# Altium PCB PCB2.PcbDoc
Units mil, origin at the board's own origin, x right, y up, seen from the top; angles counter-clockwise.
Board outline 3500 x 2000 mil, 2 copper layers (Top Layer, Bottom Layer), stack 61.756 mil thick; 25 components, 12 nets, 69 pads, 9 vias.
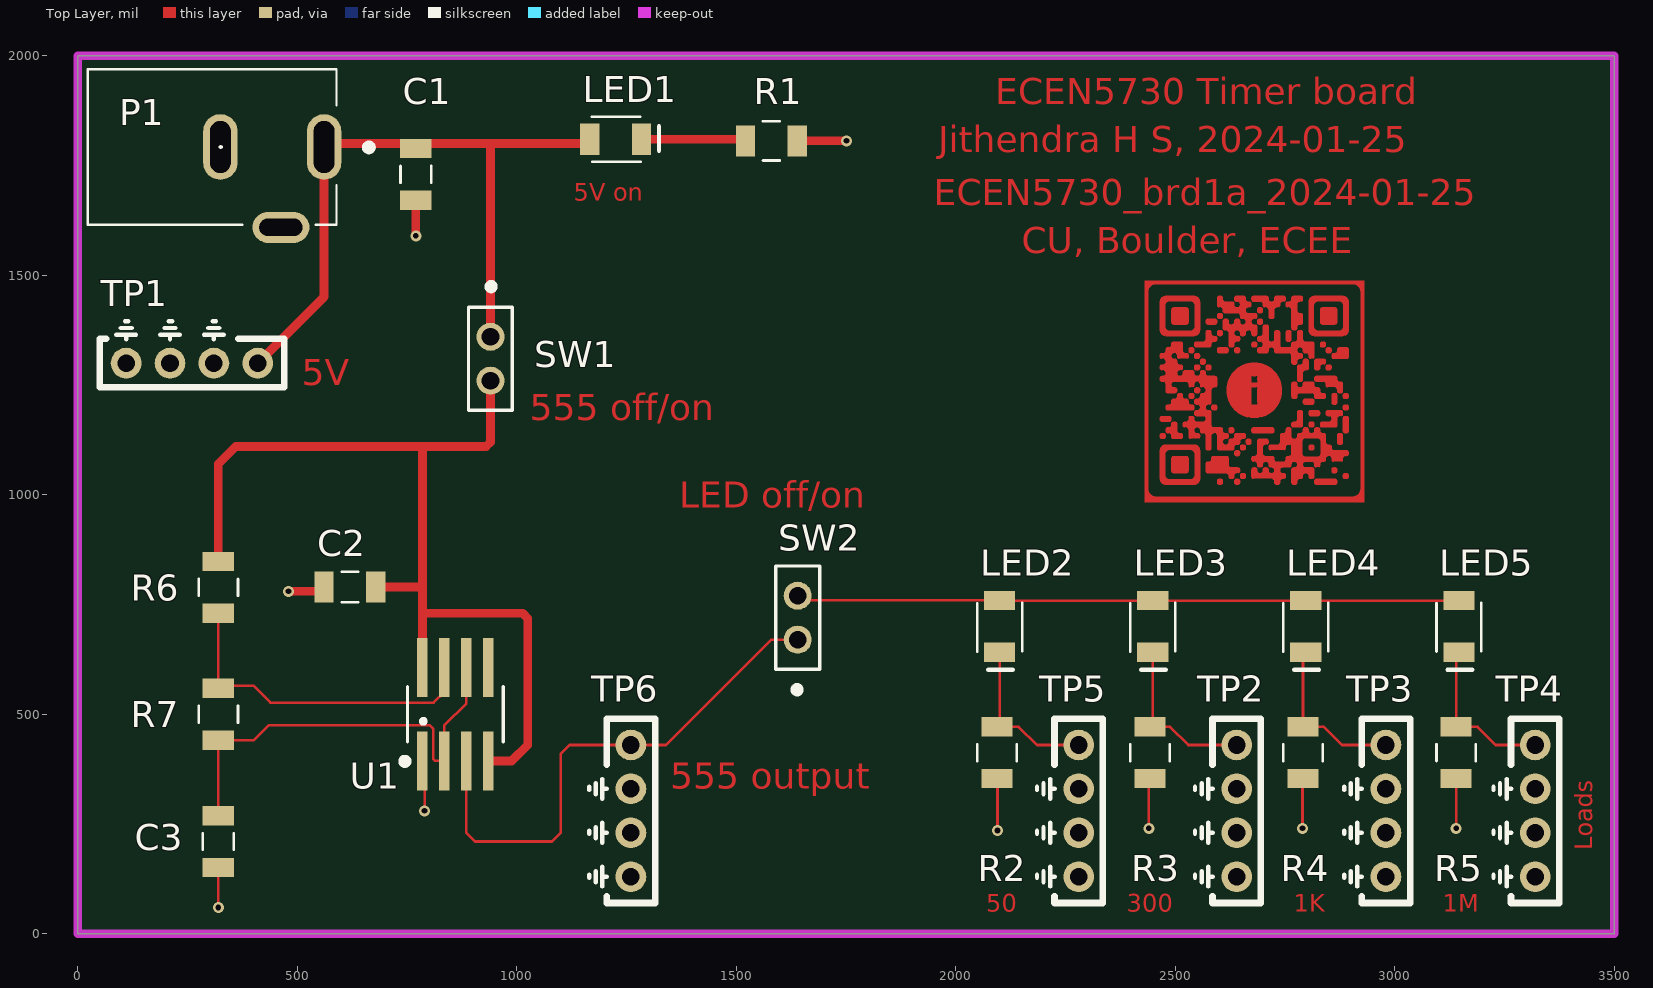
[diagram p0: Top Layer view]
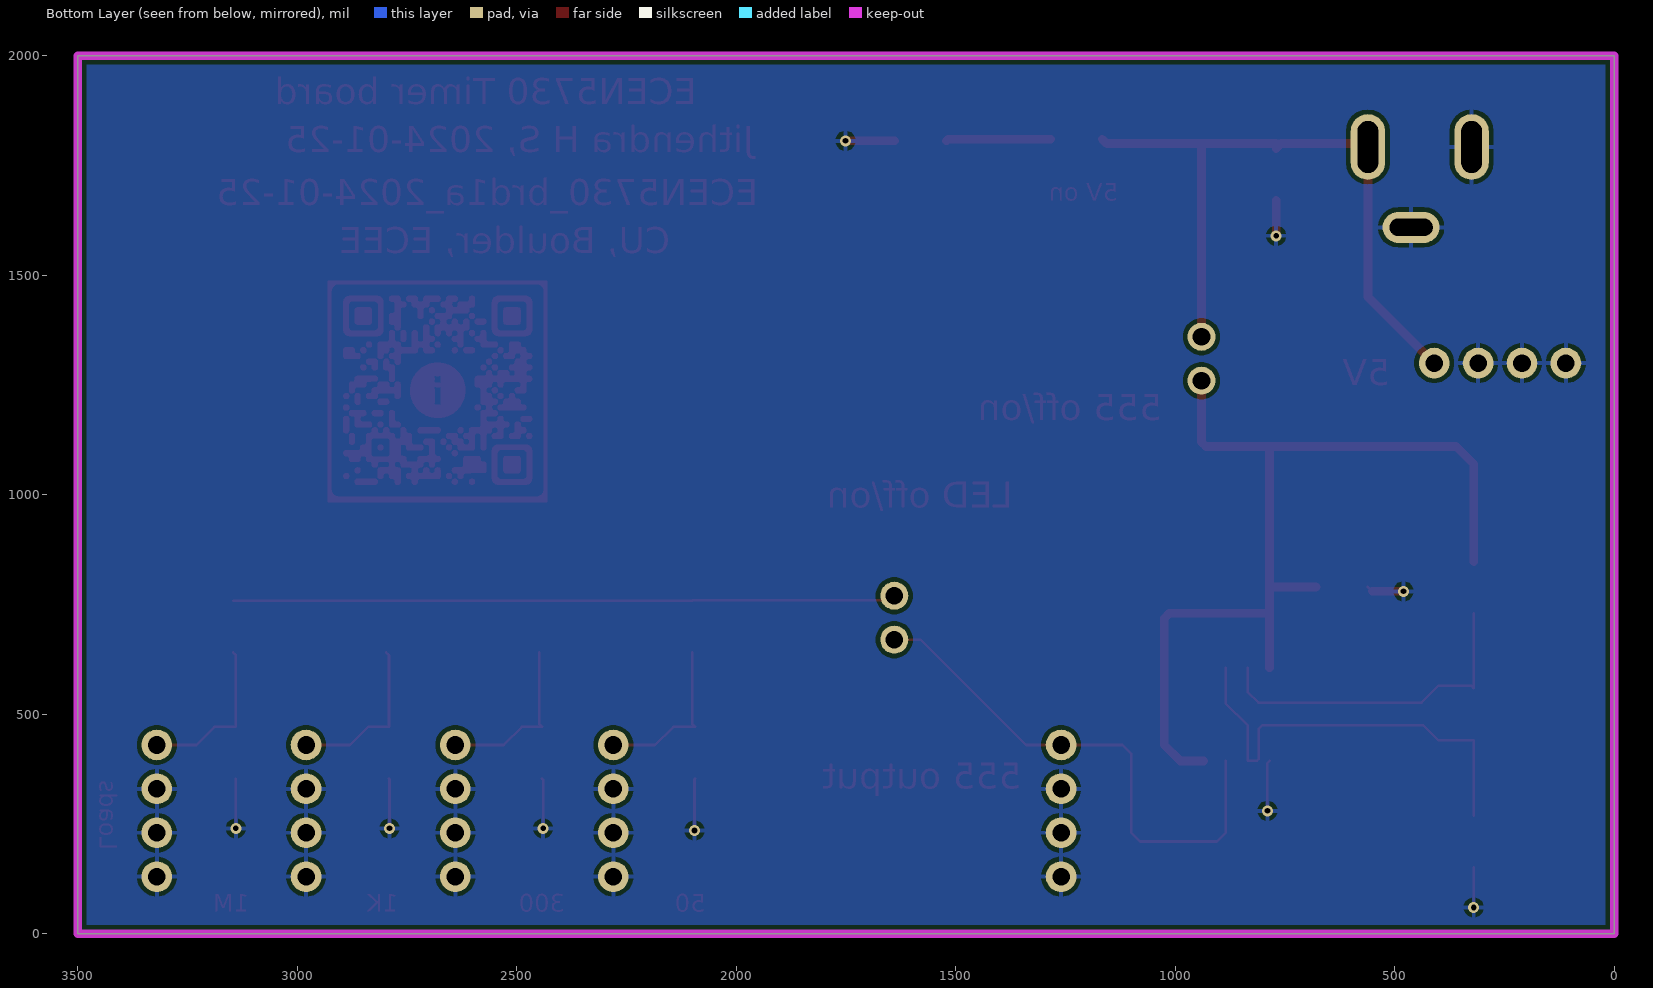
[diagram p1: Bottom Layer view, seen from below]
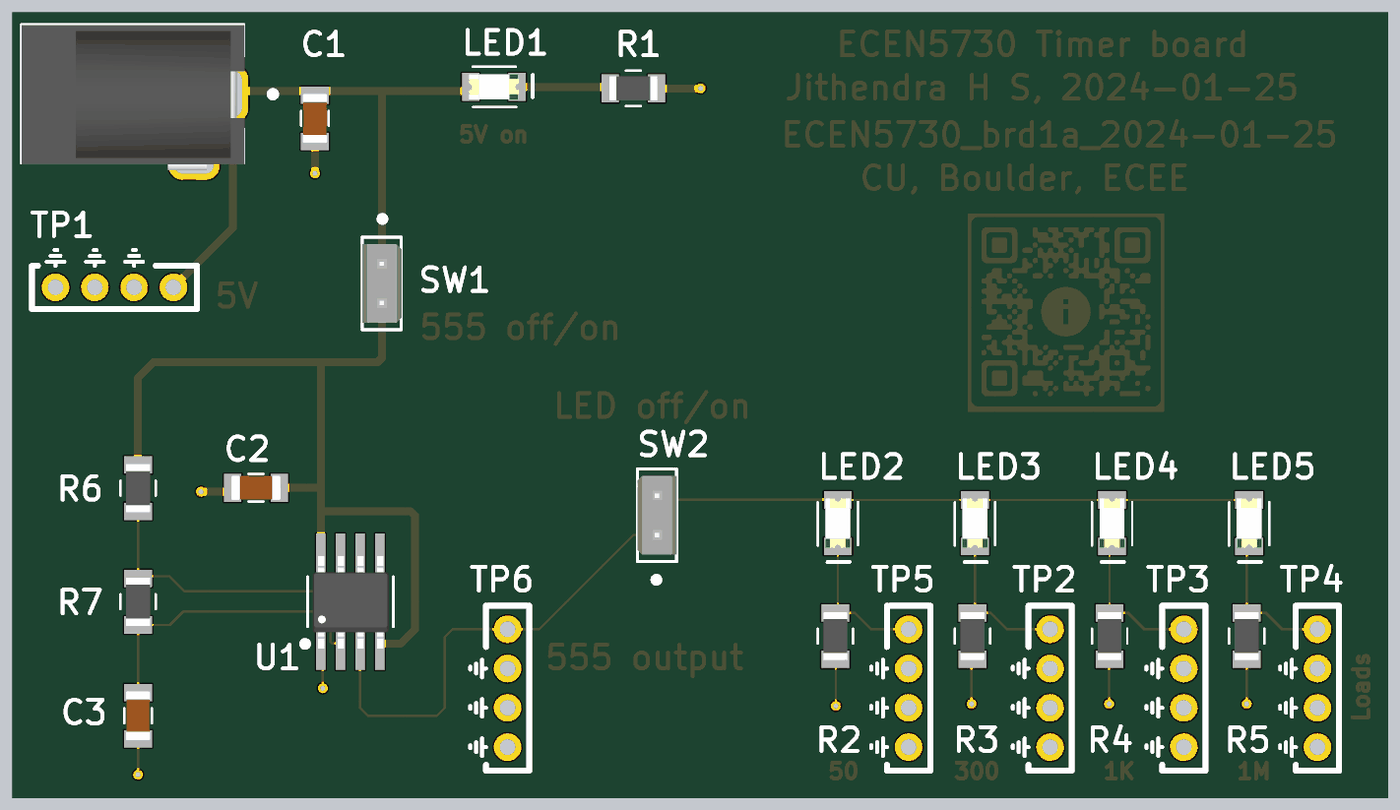
[diagram p2: 3D render of the assembled board from above, using the file's embedded part models]

## Layer stack, top to bottom
Top Solder: solder mask 1, SM-001, Dk 4
Top Layer: signal copper 1.378
Dielectric 1: core 59, Core-043, Dk 4.3
Bottom Layer: signal copper 1.378
Bottom Solder: solder mask 1, SM-001, Dk 4

## Board outline
0,0 3500,0 3500,2000 0,2000

## Design rules (kind name [scope] priority, off if disabled: settings)
BoardOutlineClearance BoardOutlineClearance_1 [All] p1: gap=10 ignorepadtopadclearanceinfootprint=FALSE
Clearance [All] p1: gap=10 ignorepadtopadclearanceinfootprint=FALSE ismatrix=TRUE
Clearance [All] p2: gap=10 ignorepadtopadclearanceinfootprint=FALSE
PlaneClearance [All] p1: clearance=10
PlaneConnect [All] p1: planeconnectstyle=Direct reliefexpansion=20 reliefentries=4 reliefconductorwidth=10 reliefairgap=10
PolygonConnect [All] p1: thpad.connectstyle=Relief thpad.reliefconductorwidth=10 thpad.reliefentries=4 thpad.polygonreliefangle="90 Angle" thpad.airgapwidth=10 smdpad.connectstyle=Direct smdpad.reliefconductorwidth=10 smdpad.reliefentries=4 smdpad.polygonreliefangle="90 Angle" smdpad.airgapwidth=10 via.connectstyle=Relief via.reliefconductorwidth=10 via.reliefentries=4 via.polygonreliefangle="90 Angle" via.airgapwidth=10
RoutingVias RoutingViaStyle_1 [All] p1: holewidth=13 width=25 viastyle="Through Hole" minholewidth=13 minwidth=25 maxholewidth=60 maxwidth=80
RoutingVias [All] p2: holewidth=28 width=50 viastyle="Through Hole" minholewidth=28 minwidth=50 maxholewidth=28 maxwidth=50
SolderMaskExpansion [All] p1: expansion=4 istentingtop=FALSE
UnRoutedNet [All] p1: checkbadconnections=TRUE
Width MaxMinWidth_3 [All] p1: maxlimit=100 minlimit=6 preferedwidth=6 minimp=50.000000 maximp=50.000000 favimp=50.000000
Width MaxMinWidth_2 [5V] p2: maxlimit=100 minlimit=10 preferedwidth=20 minimp=50.000000 maximp=50.000000 favimp=50.000000
Width MaxMinWidth_1 [555_5V] p3: maxlimit=100 minlimit=10 preferedwidth=20 minimp=50.000000 maximp=50.000000 favimp=50.000000
Width [All] p4: maxlimit=10 minlimit=10 preferedwidth=10
27 further rules are at their usual default settings.

## Components (designator, comment, footprint, x,y, rotation, side; value= is the part's Value field where it differs from the comment)
C1 "22uF" 1206_Passive_Capacitor 770,1730 r90 top
C2 "0.01uF" 1206_Passive_Capacitor 620,790 r0 top
C3 "1uF" 1206_Passive_Capacitor 320,210 r270 top
LED1 "Red" LED_1206 1225,1810 r0 top
LED2 "Yellow" LED_1206 2100,700 r270 top
LED3 "Yellow" LED_1206 2448.77,700 r270 top
LED4 "Yellow" LED_1206 2797.53,700 r270 top
LED5 "Yellow" LED_1206 3146.3,700 r270 top
P1 "Power Jack" Power_Jack 561,1792.35 r180 top value="CONN PWR JACK 2X5.5MM SOLDER"
R1 "1k" 1206_Passive_Resitor 1580,1806.3 r180 top value="1K Ohm"
R2 "50" 1206_Passive_Resitor 2093.7,412.5 r90 top value="50 Ohm"
R3 "300" 1206_Passive_Resitor 2442.47,412.5 r90 top value="300 Ohm"
R4 "1k" 1206_Passive_Resitor 2791.23,412.5 r90 top value="1K Ohm"
R5 "1M" 1206_Passive_Resitor 3140,412.5 r90 top value="1M Ohm"
R6 "1k" 1206_Passive_Resitor 320,789 r90 top value="1K Ohm"
R7 "1k" 1206_Passive_Resitor 320,500 r90 top value="1K Ohm"
SW1 "SW_555off/On" 2Pin-Header-Conn 940,1360 r270 top
SW2 "LED off/on" 2Pin-Header-Conn 1640,670 r90 top
TP1 "TP_5V" TP10x_Probe 260,1300 r180 top
TP2 "TP_300ohm" TP10x_Probe 2640,280 r270 top
TP3 "TP_1Kohm" TP10x_Probe 2980,280 r270 top
TP4 "TP_1Mohm" TP10x_Probe 3320,280 r270 top
TP5 "TP_50ohm" TP10x_Probe 2280,280 r270 top
TP6 "TP_555_output" TP10x_Probe 1260,280 r270 top
U1 "NE555DR" TS555IDTTR 860,500 r90 top

## Footprints (in the part's own frame and the unit in brackets; to place one, negate y for a bottom-side part, rotate by r counter-clockwise, add the part's x,y. Pads: shape width x height; smd on the part's side, far side on the other; paste and mask are expansions set on the pad)
2Pin-Header-Conn [mm]
  round 1.62 hole 1.02: 1(0,0) 2(2.54,0)
  silkscreen extent -3.03,-1.27 4.26,1.26, body extent -1.27,-1.27 3.81,1.27, height 8.13
1206_Passive_Capacitor [mil]
  rect 44x71 smd: 1(-59,0) 2(59,0)
  silkscreen extent -19,-35 19,35, body extent -63,-31 63,32, height 50
1206_Passive_Resitor [mil]
  rect 44x71 smd: 1(-59,0) 2(59,0)
  silkscreen extent -19,-45 19,45, body extent -61,-31 61,31, height 26
LED_1206 [mil]
  rect 44x71 smd: 1(-59,0) 2(59,0)
  silkscreen extent -54,-51 99,51, body extent -63,-31 63,31, height 28
Power_Jack [mm]
  oval 2x3.8 hole 1.2 slot 3 at 90 deg: 1(0,0) 2(6,0)
  oval 3.3x1.8 hole 1 slot 2.5 at 0 deg: 3(2.5,4.65)
  silkscreen extent -2.79,-4.5 13.68,4.5, body extent -0.76,-4.45 13.64,4.95, height 11.49
TP10x_Probe [mil] "Small Probs footprint"
  round 70 hole 40: 1(-150,0) 2(-50,0) 2(50,0) 2(150,0)
  silkscreen extent -210,-95 210,55
TS555IDTTR [mm] "IC OSC Single Timer 2.7MHz 8SOIC"
  rect 3.4x0.6 smd: 1(-2.7,1.905) 2(-2.7,0.635) 3(-2.7,-0.635) 4(-2.7,-1.905) 5(2.7,-1.905) 6(2.7,-0.635) 7(2.7,0.635) 8(2.7,1.905)
  silkscreen extent -2.85,-2.77 1.6,3.05, body extent -3.03,-2.48 2.96,2.43, height 1.75

## Part data
C1: library part C_22uF_1206, "22uF ±10% 25V X5R 1206 Multilayer Ceramic Capacitors MLCC - SMD/SMT RoHS", LCSC Part#=C12891, MFR Part #=CL31A226KAHNNNE, Datasheet=https://datasheet.lcsc.com/lcsc/1811031514_Samsung-Electro-Mechanics-CL31A226KAHNNNE_C12891.pdf, Type=basic
C2 C3: library part C_1uF_1206, "MULTILAYER CERAMIC CAPACITORS MLCC - SMD/SMT 1UF 50V 1206 ROHS", LCSC Part#=C1848, MFR Part #=CL31B105KBHNNNE, Digikey Link=https://www.digikey.com/product-detail/en/C1206C105M4RACTU/399-8150-1-ND/3471873/?itemSeq=304982366, Type=Basic
LED1: library part LED_RED_1206, "Red 621~631nm 1206 Light Emitting Diodes (LED) RoHS", LCSC Part#=C93133, MFR Part #=15-21/R6C-FQ1R1B/2T, Datasheet=https://datasheet.lcsc.com/szlcsc/1811151241_Everlight-Elec-15-21-R6C-FQ1R1B-2T_C93133.pdf, Type=Extended
LED2 LED3 LED4 LED5: library part LED_YELLOW_1206, "yellow 1206  Light Emitting Diodes (LED) ROHS", LCSC Part#=C93094, MFR Part #=NCD1206Y1, Datasheet=https://datasheet.lcsc.com/lcsc/2008201033_Foshan-NationStar-Optoelectronics-NCD1206Y1_C93094.pdf, Type=Extended
P1: library part "P_Power Jack", "Power Barrel Connector Jack 2.10mm ID (0.083\"), 5.50mm OD (0.217\") Through Hole, Right Angle", LCSC Part#=C136744, MFR Part #=PJ-102A, Digikey Link=https://www.digikey.com/product-detail/en/PJ-102A/CP-102A-ND/275425/?itemSeq=304982367, Type=Extended
R1 R2 R3 R4 R5 R6 R7: library part R_1K_1206, "CHIP RESISTOR - SURFACE MOUNT 1KOHMS ±1% 1/4W 1206 ROHS", LCSC Part#=C4410, MFR Part #=RNCP1206FTD1K00CT, Digikey Link=https://www.digikey.com/product-detail/en/RNCP1206FTD1K00/RNCP1206FTD1K00CT-ND/2240675/?itemSeq=304982373, Type=Basic
SW1 SW2: library part SW_2Pin_100mil_Switch, "2Pin Header", LCSC Part#=C124375, Type=Extended
TP1 TP2 TP3 TP4 TP5 TP6: library part TP_10x_Probe, "Test Point 300 mil centers"
U1: library part U_555_Slow, "555 Timer SOIC-8_150MIL ROHS 150ns Rise Time", LCSC Part#=C7593, Digikey Link=https://www.digikey.com/product-detail/en/texas-instruments/NE555DR/296-6501-1-ND/372490, MFR Part #=NE555DR, Type=Basic

## Via types
v1: diameter 25, hole 13, Top Layer to Bottom Layer, 9 vias

## Nets (pads, with @x,y where several pads share a name; then routed paths per layer and width w, separated by ;. In a path a pad name is that pad's centre, name@x,y a point inside that pad or via, vN(x,y) a via of type N, cw(c..) or ccw(c..) an arc to the next point about the centre after c; other vN are vias at no path point)
5V: C1.2 LED1.1 P1.1 SW1.1 TP1.1 | length 1614.6
  Top Layer w20: TP1.1 561,1451 P1.1@561,1795.22 ; P1.1 568.65,1800 759,1800 C1.2 ; C1.2@770,1800 940,1800 ; SW1.1 940,1800 ; LED1.1 1156,1800 940,1800
555_5V: C2.2 R6.2 SW1.2 U1.4 U1.8 | length 2252.7
  Top Layer w20: R6.2 320,1070 360,1110 780,1110 ; C2.2 785,790 ; U1.8 785,730 ; U1.4 988.7,393.7 1025,430 1025,718.28 1013.28,730 785,730 ; SW1.2 940,1120 930,1110 780,1110 ; 780,1110 785,1105 785,790 ; 785,730 785,790
555_output: SW2.1 TP6.1 U1.3 | length 1243
  Top Layer w6: U1.3 885,230 905,210 1080,210 1100,230 1100,410 1120,430 TP6.1 1340,430 1580,670 SW2.1 ; SW2.1@1620,660 SW2.1@1640,660
GND: C1.1 C2.1 C3.2 P1.2 P1.3 R1.1 R2.1 R3.1 R4.1 R5.1 TP1.2 TP2.2 TP3.2 TP4.2 TP5.2 TP6.2 U1.1 | length 946.1
  Top Layer w6: v1(320,60) C3.2 ; C2.1@551,780 C2.1 ; U1.1 790,388.7 v1(790,280) ; R2.1 2095,352.2 v1(2095,235) ; v1(2440,240) 2440,351.03 R3.1 ; v1(2790,240) 2790,352.27 R4.1 ; v1(3140,240) R5.1
  Top Layer w20: v1(480,780) C2.1@551,780 ; v1(770,1590) C1.1 ; R1.1 v1(1751.16,1806.3)
NetC3_1: C3.1 R7.1 U1.2 U1.6 | length 1007.9
  Top Layer w6: C3.1 R7.1 401,441 435,475 800.83,475 809.81,466.01 809.81,398.08 814.19,393.7 U1.2 835,475 885,525 U1.6
NetLED1_2: LED1.2 R1.2 | length 238.5
  Top Layer w20: LED1.2 1517.3,1810 R1.2
NetLED2_1: LED2.1 LED3.1 LED4.1 LED5.1 SW2.2 | length 1510.9
  Top Layer w6: SW2.2 1650,760 2099,760 LED2.1 LED3.1 LED4.1 LED5.1
NetLED2_2: LED2.2 R2.2 TP5.1 | length 375.6
  Top Layer w6: LED2.2 2100,477.8 R2.2 2143.5,471.5 2185,430 TP5.1
NetLED3_2: LED3.2 R3.2 TP2.1 | length 386.8
  Top Layer w6: LED3.2 2448.77,477.8 R3.2 2488.5,471.5 2530,430 TP2.1
NetLED4_2: LED4.2 R4.2 TP3.1 | length 378.1
  Top Layer w6: LED4.2 2791.23,634.7 R4.2 2838.5,471.5 2880,430 TP3.1
NetLED5_2: LED5.2 R5.2 TP4.1 | length 369.3
  Top Layer w6: LED5.2 3140,634.7 R5.2 3188.5,471.5 3230,430 TP4.1
NetR6_1: R6.1 R7.2 U1.7 | length 769.9
  Top Layer w6: R6.1 R7.2 326,565 400,565 438.63,526.37 810.19,526.37 835,551.18 U1.7
pads on no net: U1.5

## Polygon pours and split planes (outlines as drawn)
GND on Bottom Layer "GND_L02_P000" (solid, pour order 0): 0,2000 3500,2000 3500,0 0,0

## Keep-outs
Keep-Out Layer:
  the board outline again, w20

## Other copper
Top Layer:
  drawing of 67 lines, arcs and shapes, not listed
  text "ECEN5730 Timer board" at 2090,1890 h60
  text "Jithendra H S, 2024-01-25" at 1960,1779.99 h60
  text "5V on" at 1130,1670 h40
  text "ECEN5730_brd1a_2024-01-25" at 1950,1660 h60
  text "CU, Boulder, ECEE" at 2150,1549.99 h60
  text "5V" at 510,1250 h60
  text "555 off/on" at 1030,1170 h60
  text "LED off/on" at 1370,970 h60
  text "555 output" at 1350,329.99 h60
  text "Loads" at 3450,190 h40 r90
  text "50" at 2070,50 h40
  text "300" at 2390,50 h40
  text "1K" at 2770,50 h40
  text "1M" at 3110,50 h40